# Altium PCB mini_backplane.PcbDoc (part 2 of 5)
Units mm, origin at the board's own origin, x right, y up, seen from the top; angles counter-clockwise.
Board outline 232.03 x 195 mm, 5 copper layers (Top Layer, MidLayer1, GND, POWER, Bottom Layer); 241 components, 200 nets, 1637 pads, 676 vias.
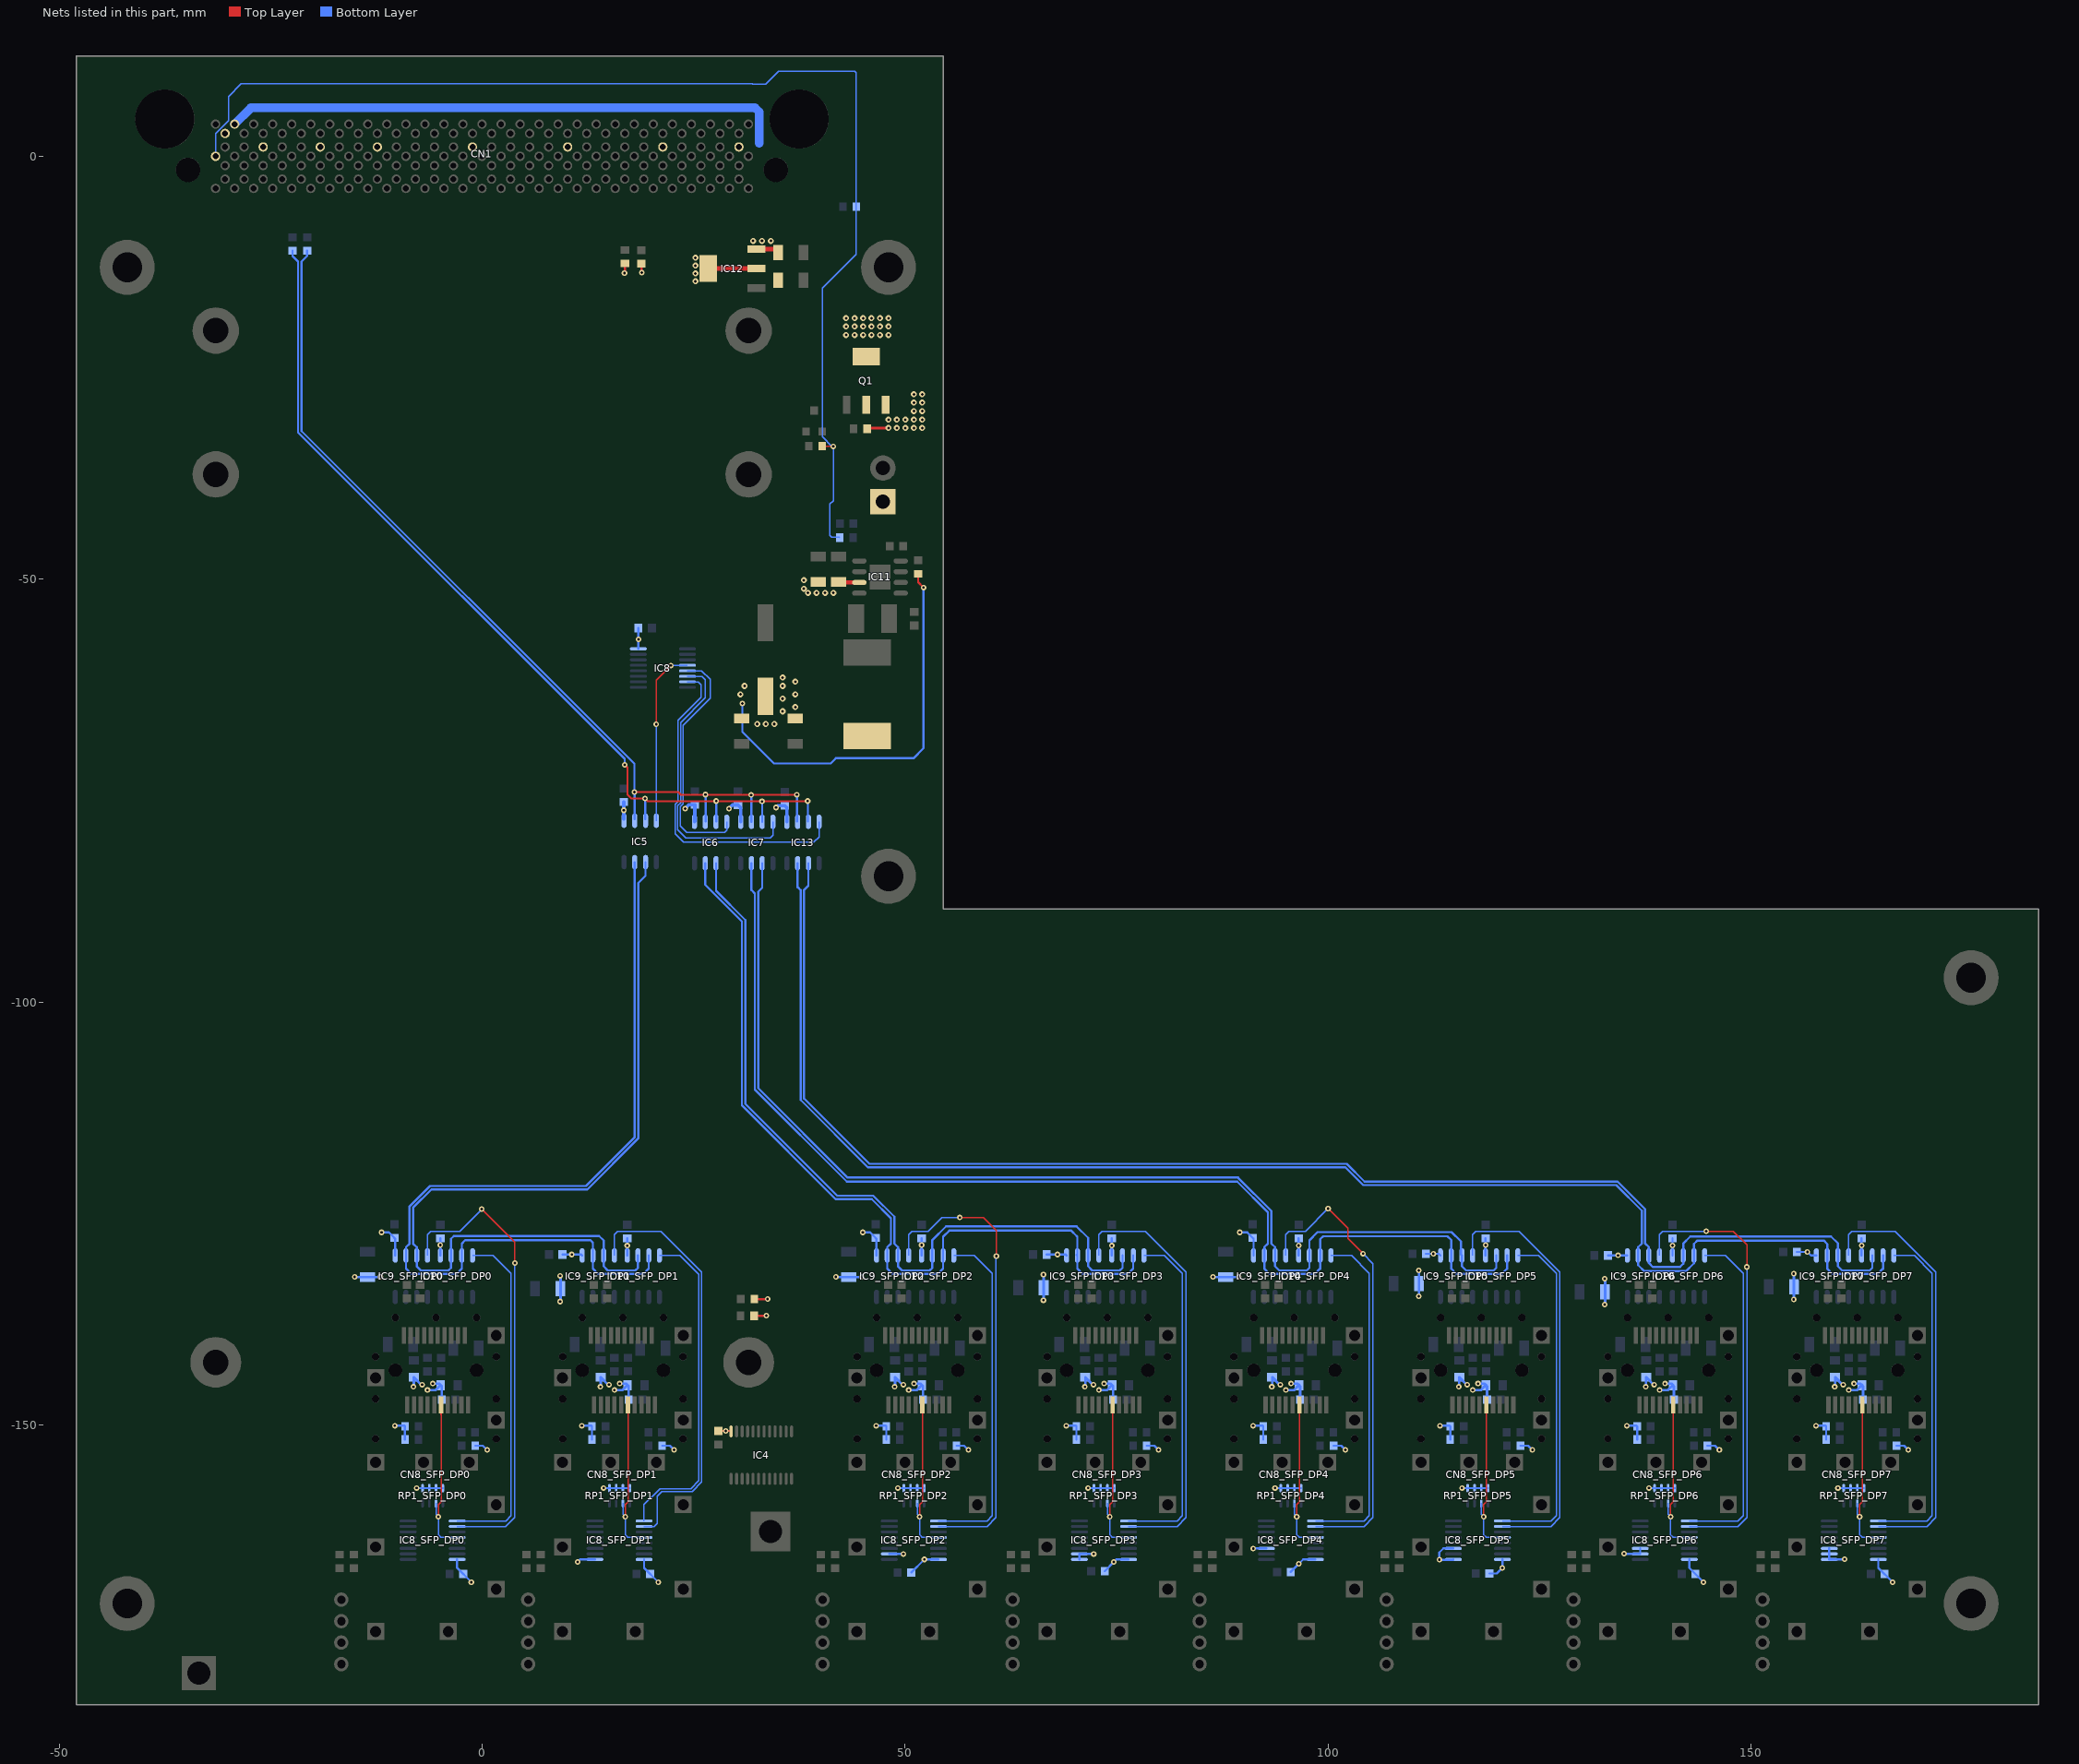
[diagram p4: the nets of this part, all layers, seen from the top]

## Via types
v1: diameter 0.66, hole 0.305, Top Layer to Bottom Layer, tented both sides, 576 vias
v2: diameter 0.711, hole 0.33, Top Layer to Bottom Layer, tented both sides, 97 vias
v3: diameter 0.66, hole 0.305, Top Layer to Bottom Layer, 3 vias

## Nets (pads, with @x,y where several pads share a name; then routed paths per layer and width w, separated by ;. In a path a pad name is that pad's centre, name@x,y a point inside that pad or via, vN(x,y) a via of type N, cw(c..) or ccw(c..) an arc to the next point about the centre after c; other vN are vias at no path point)
+3V3: C75.2 C76.2 C77.2 C78.2 C80_SFP_DP0.2 C80_SFP_DP1.2 C80_SFP_DP2.2 C80_SFP_DP3.2 C80_SFP_DP4.2 C80_SFP_DP5.2 C80_SFP_DP6.2 C80_SFP_DP7.2 C81_SFP_DP0.2 C81_SFP_DP1.2 C81_SFP_DP2.2 C81_SFP_DP3.2 C81_SFP_DP4.2 C81_SFP_DP5.2 C81_SFP_DP6.2 C81_SFP_DP7.2 C85.1 C90.2 C92.2 C93.2 C121.2 C121_SFP_DP0.2 C121_SFP_DP1.2 C121_SFP_DP2.2 C121_SFP_DP3.2 C121_SFP_DP4.2 C121_SFP_DP5.2 C121_SFP_DP6.2 C121_SFP_DP7.2 C122_SFP_DP0.2 C122_SFP_DP1.2 C122_SFP_DP2.2 C122_SFP_DP3.2 C122_SFP_DP4.2 C122_SFP_DP5.2 C122_SFP_DP6.2 C122_SFP_DP7.2 C123_SFP_DP0.2 C123_SFP_DP1.2 C123_SFP_DP2.2 C123_SFP_DP3.2 C123_SFP_DP4.2 C123_SFP_DP5.2 C123_SFP_DP6.2 C123_SFP_DP7.2 IC4.24 IC5.5 IC6.5 IC7.5 IC8.16 IC8_SFP_DP0.16 IC8_SFP_DP1.1 IC8_SFP_DP1.16 IC8_SFP_DP2.2 IC8_SFP_DP2.16 IC8_SFP_DP3.1 IC8_SFP_DP3.2 IC8_SFP_DP3.16 IC8_SFP_DP4.3 IC8_SFP_DP4.16 IC8_SFP_DP5.1 IC8_SFP_DP5.3 IC8_SFP_DP5.16 IC8_SFP_DP6.2 IC8_SFP_DP6.3 IC8_SFP_DP6.16 IC8_SFP_DP7.1 IC8_SFP_DP7.2 IC8_SFP_DP7.3 IC8_SFP_DP7.16 IC9_SFP_DP0.5 IC9_SFP_DP1.5 IC9_SFP_DP2.5 IC9_SFP_DP3.5 IC9_SFP_DP4.5 IC9_SFP_DP5.5 IC9_SFP_DP6.5 IC9_SFP_DP7.5 IC10_SFP_DP0.5 IC10_SFP_DP1.5 IC10_SFP_DP2.5 IC10_SFP_DP3.5 IC10_SFP_DP4.5 IC10_SFP_DP5.5 IC10_SFP_DP6.5 IC10_SFP_DP7.5 IC13.5 L1.2 L8_SFP_DP0.2 L8_SFP_DP1.2 L8_SFP_DP2.2 L8_SFP_DP3.2 L8_SFP_DP4.2 L8_SFP_DP5.2 L8_SFP_DP6.2 L8_SFP_DP7.2 L9_SFP_DP0.2 L9_SFP_DP1.2 L9_SFP_DP2.2 L9_SFP_DP3.2 L9_SFP_DP4.2 L9_SFP_DP5.2 L9_SFP_DP6.2 L9_SFP_DP7.2 R1.2 R2.2 R3.2 R4.2 R21_SFP_DP0.2 R21_SFP_DP1.2 R21_SFP_DP2.2 R21_SFP_DP3.2 R21_SFP_DP4.2 R21_SFP_DP5.2 R21_SFP_DP6.2 R21_SFP_DP7.2 R22_SFP_DP0.2 R22_SFP_DP1.2 R22_SFP_DP2.2 R22_SFP_DP3.2 R22_SFP_DP4.2 R22_SFP_DP5.2 R22_SFP_DP6.2 R22_SFP_DP7.2 R71_SFP_DP0.1 R71_SFP_DP1.1 R71_SFP_DP2.1 R71_SFP_DP3.1 R71_SFP_DP4.1 R71_SFP_DP5.1 R71_SFP_DP6.1 R71_SFP_DP7.1 R76.2 RP1_SFP_DP0.1 RP1_SFP_DP0.2 RP1_SFP_DP0.3 RP1_SFP_DP0.4 RP1_SFP_DP1.1 RP1_SFP_DP1.2 RP1_SFP_DP1.3 RP1_SFP_DP1.4 RP1_SFP_DP2.1 RP1_SFP_DP2.2 RP1_SFP_DP2.3 RP1_SFP_DP2.4 RP1_SFP_DP3.1 RP1_SFP_DP3.2 RP1_SFP_DP3.3 RP1_SFP_DP3.4 RP1_SFP_DP4.1 RP1_SFP_DP4.2 RP1_SFP_DP4.3 RP1_SFP_DP4.4 RP1_SFP_DP5.1 RP1_SFP_DP5.2 RP1_SFP_DP5.3 RP1_SFP_DP5.4 RP1_SFP_DP6.1 RP1_SFP_DP6.2 RP1_SFP_DP6.3 RP1_SFP_DP6.4 RP1_SFP_DP7.1 RP1_SFP_DP7.2 RP1_SFP_DP7.3 RP1_SFP_DP7.4 | length 294.8
  Top Layer w0.254: v1(16.84,-13.807) 16.891,-13.757 R2.2@16.891,-12.677 ; R1.2@18.846,-12.702 18.846,-13.731 v1(18.872,-13.757) ; C75.2@27.94,-150.726 v1(28.803,-150.726) 29.387,-150.726 IC4.24@29.445,-150.784 ; R3.2@32.169,-137.124 33.604,-137.124 v1(33.629,-137.099) ; R4.2@32.194,-135.143 33.731,-135.143 v1(33.756,-135.118) ; R76.2@51.562,-49.38 51.562,-50.358 v1(52.197,-50.993)
  Bottom Layer w0.254: v1(-11.888,-127.244) -11.011,-127.244 C80_SFP_DP0.2@-10.364,-127.891 -10.262,-127.993 IC9_SFP_DP0.5@-10.262,-129.975 ; v1(-10.313,-150.104) -9.182,-150.104 R21_SFP_DP0.2@-9.106,-150.18 R22_SFP_DP0.2@-9.106,-151.729 ; v1(-7.722,-157.47) -7.697,-157.495 RP1_SFP_DP0.4@-4.636,-157.495 ; IC10_SFP_DP0.5@-4.928,-129.975 v1(-4.928,-128.742) C81_SFP_DP0.2@-4.928,-127.942 ; IC8_SFP_DP0.16@-2.942,-165.917 -2.942,-166.91 -1.27,-168.582 v1(-1.27,-168.62) ; R71_SFP_DP0.1@-0.801,-152.466 0.101,-152.466 v1(0.609,-152.974) ; C80_SFP_DP1.2@9.512,-129.86 v1(10.617,-129.86) 11.721,-129.86 IC9_SFP_DP1.5@11.836,-129.975 ; v3(11.303,-166.207) 11.593,-165.917 IC8_SFP_DP1.1@13.356,-165.917 ; v1(11.785,-150.104) 12.916,-150.104 R21_SFP_DP1.2@12.992,-150.18 R22_SFP_DP1.2@12.992,-151.729 ; v1(14.376,-157.47) 14.401,-157.495 RP1_SFP_DP1.4@17.462,-157.495 ; IC10_SFP_DP1.5@17.17,-129.975 v1(17.17,-128.819) C81_SFP_DP1.2@17.17,-127.942 ; IC8_SFP_DP1.16@19.156,-165.917 19.156,-166.91 20.828,-168.582 v1(20.828,-168.62) ; R71_SFP_DP1.1@21.297,-152.466 22.199,-152.466 v1(22.707,-152.974) ; v1(30.784,-64.709) 30.784,-68.062 34.518,-71.796 41.224,-71.796 41.833,-71.186 51.003,-71.186 52.197,-69.992 v1(52.197,-50.993) ; v1(45.008,-127.244) 45.885,-127.244 C80_SFP_DP2.2@46.532,-127.891 46.634,-127.993 IC9_SFP_DP2.5@46.634,-129.975 ; v1(46.583,-150.104) 47.714,-150.104 R21_SFP_DP2.2@47.79,-150.18 R22_SFP_DP2.2@47.79,-151.729 ; IC8_SFP_DP2.2@48.154,-165.267 v1(49.809,-165.268) ; v1(49.174,-157.47) 49.199,-157.495 RP1_SFP_DP2.4@52.26,-157.495 ; C121_SFP_DP2.2@50.736,-167.477 v1(52.296,-165.917) IC8_SFP_DP2.16@53.954,-165.917 ; IC10_SFP_DP2.5@51.968,-129.975 v1(51.968,-128.742) C81_SFP_DP2.2@51.968,-127.942 ; R71_SFP_DP2.1@56.095,-152.466 56.997,-152.466 v1(57.505,-152.974) ; C80_SFP_DP3.2@66.738,-129.86 v1(68.021,-129.86) 68.998,-129.86 IC9_SFP_DP3.5@69.113,-129.975 ; v1(69.062,-150.104) 70.193,-150.104 R21_SFP_DP3.2@70.269,-150.18 R22_SFP_DP3.2@70.269,-151.729 ; IC8_SFP_DP3.1@70.633,-165.917 IC8_SFP_DP3.2@70.633,-165.267 v1(72.313,-165.268) ; v1(71.653,-157.47) 71.678,-157.495 RP1_SFP_DP3.4@74.739,-157.495 ; C121_SFP_DP3.2@73.621,-167.3 v1(74.695,-166.226) 75.004,-165.917 IC8_SFP_DP3.16@76.433,-165.917 ; IC10_SFP_DP3.5@74.447,-129.975 v1(74.447,-128.819) C81_SFP_DP3.2@74.447,-127.942 ; R71_SFP_DP3.1@78.574,-152.466 79.476,-152.466 v1(79.984,-152.974) ; v1(89.585,-127.244) 90.462,-127.244 C80_SFP_DP4.2@91.109,-127.891 91.211,-127.993 IC9_SFP_DP4.5@91.211,-129.975 ; v1(91.16,-150.104) 92.291,-150.104 R21_SFP_DP4.2@92.367,-150.18 R22_SFP_DP4.2@92.367,-151.729 ; v1(91.186,-164.633) 91.201,-164.617 IC8_SFP_DP4.3@92.731,-164.617 ; v1(93.751,-157.47) 93.776,-157.495 RP1_SFP_DP4.4@96.837,-157.495 ; C121_SFP_DP4.2@95.592,-167.401 v1(96.551,-166.442) 97.077,-165.917 IC8_SFP_DP4.16@98.531,-165.917 ; IC10_SFP_DP4.5@96.545,-129.975 v1(96.545,-128.793) C81_SFP_DP4.2@96.545,-127.942 ; R71_SFP_DP4.1@100.672,-152.466 101.574,-152.466 v1(102.082,-152.974) ; C80_SFP_DP5.2@111.594,-129.784 v1(112.471,-129.784) 113.117,-129.784 IC9_SFP_DP5.5@113.309,-129.975 ; v1(113.258,-150.104) 114.389,-150.104 R21_SFP_DP5.2@114.465,-150.18 R22_SFP_DP5.2@114.465,-151.729 ; IC8_SFP_DP5.1@114.829,-165.917 114.792,-165.953 v1(113.182,-165.953) 113.182,-165.09 113.655,-164.617 IC8_SFP_DP5.3@114.829,-164.617 ; v1(115.849,-157.47) 115.874,-157.495 RP1_SFP_DP5.4@118.935,-157.495 ; IC10_SFP_DP5.5@118.643,-129.975 v1(118.643,-128.742) C81_SFP_DP5.2@118.643,-127.942 ; C121_SFP_DP5.2@119.087,-167.579 119.96,-167.579 v1(120.629,-166.91) IC8_SFP_DP5.16@120.629,-165.917 ; R71_SFP_DP5.1@122.77,-152.466 123.672,-152.466 v1(124.18,-152.974) ; C80_SFP_DP6.2@133.108,-129.962 v1(134.315,-129.962) 135.393,-129.962 IC9_SFP_DP6.5@135.407,-129.975 ; v1(135.026,-165.242) 135.051,-165.267 IC8_SFP_DP6.2@136.927,-165.267 IC8_SFP_DP6.3@136.927,-164.617 ; v1(135.356,-150.104) 136.487,-150.104 R21_SFP_DP6.2@136.563,-150.18 R22_SFP_DP6.2@136.563,-151.729 ; v1(137.947,-157.47) 137.972,-157.495 RP1_SFP_DP6.4@141.033,-157.495 ; IC10_SFP_DP6.5@140.741,-129.975 v1@140.741,-128.666 ; v1(140.741,-128.793) v1@140.741,-128.666 ; C81_SFP_DP6.2@140.741,-127.942 v1@140.741,-128.666 ; IC8_SFP_DP6.16@142.727,-165.917 142.727,-166.91 144.399,-168.582 v1(144.399,-168.62) ; R71_SFP_DP6.1@144.868,-152.466 145.77,-152.466 v1(146.278,-152.974) ; C80_SFP_DP7.2@155.435,-129.555 v1(156.692,-129.555) 157.112,-129.975 IC9_SFP_DP7.5@157.759,-129.975 ; v1(157.708,-150.104) 158.839,-150.104 R21_SFP_DP7.2@158.915,-150.18 R22_SFP_DP7.2@158.915,-151.729 ; IC8_SFP_DP7.3@159.279,-164.617 IC8_SFP_DP7.1@159.279,-165.917 161.047,-165.917 v1(161.086,-165.877) ; v1(160.299,-157.47) 160.324,-157.495 RP1_SFP_DP7.4@163.385,-157.495 ; IC10_SFP_DP7.5@163.093,-129.975 C81_SFP_DP7.2@163.093,-127.942 ; IC8_SFP_DP7.16@165.079,-165.917 165.079,-166.91 166.751,-168.582 v1(166.751,-168.62) ; R71_SFP_DP7.1@167.22,-152.466 168.122,-152.466 v1(168.63,-152.974)
  Bottom Layer w0.305: v1(-15.063,-132.502) -15.036,-132.528 C122_SFP_DP0.2@-13.564,-132.528 -12.041,-132.528 v1(-12.015,-132.502) ; v1(-8.103,-145.506) -8.052,-145.456 L8_SFP_DP0.2@-8.052,-144.373 -7.173,-145.252 v1(-7.087,-145.252) ; v1(-6.452,-145.887) -5.471,-145.887 L9_SFP_DP0.2@-4.887,-145.303 ; v1(-5.817,-145.125) -5.064,-145.125 L9_SFP_DP0.2@-4.887,-145.303 ; C123_SFP_DP0.2@-4.763,-147.03 -4.763,-145.427 L9_SFP_DP0.2@-4.887,-145.303 ; v1(9.245,-135.423) 9.272,-135.396 C122_SFP_DP1.2@9.272,-133.924 9.272,-132.401 v1(9.245,-132.375) ; v1(13.995,-145.506) 14.046,-145.456 L8_SFP_DP1.2@14.046,-144.373 14.925,-145.252 v1(15.011,-145.252) ; v1(15.646,-145.887) 16.627,-145.887 L9_SFP_DP1.2@17.211,-145.303 ; v1(16.281,-145.125) 17.034,-145.125 L9_SFP_DP1.2@17.211,-145.303 ; C123_SFP_DP1.2@17.335,-147.03 17.335,-145.427 L9_SFP_DP1.2@17.211,-145.303 ; C121.2@18.478,-55.794 18.478,-57.102 v1(18.491,-57.114) 18.486,-57.119 IC8.16@18.486,-58.243 ; v1(41.833,-132.502) 41.86,-132.528 C122_SFP_DP2.2@43.332,-132.528 44.855,-132.528 v1(44.881,-132.502) ; v1(48.793,-145.506) 48.844,-145.456 L8_SFP_DP2.2@48.844,-144.373 49.723,-145.252 v1(49.809,-145.252) ; v1(50.444,-145.887) 51.425,-145.887 L9_SFP_DP2.2@52.009,-145.303 ; v1(51.079,-145.125) 51.832,-145.125 L9_SFP_DP2.2@52.009,-145.303 ; C123_SFP_DP2.2@52.133,-147.03 52.133,-145.427 L9_SFP_DP2.2@52.009,-145.303 ; v1(66.37,-135.27) 66.397,-135.243 C122_SFP_DP3.2@66.397,-133.772 66.397,-132.249 v1(66.37,-132.222) ; v1(71.272,-145.506) 71.323,-145.456 L8_SFP_DP3.2@71.323,-144.373 72.202,-145.252 v1(72.288,-145.252) ; v1(72.923,-145.887) 73.904,-145.887 L9_SFP_DP3.2@74.488,-145.303 ; v1(73.558,-145.125) 74.311,-145.125 L9_SFP_DP3.2@74.488,-145.303 ; C123_SFP_DP3.2@74.612,-147.03 74.612,-145.427 L9_SFP_DP3.2@74.488,-145.303 ; v1(86.41,-132.502) 86.437,-132.528 C122_SFP_DP4.2@87.909,-132.528 89.432,-132.528 v1(89.458,-132.502) ; v1(93.37,-145.506) 93.421,-145.456 L8_SFP_DP4.2@93.421,-144.373 94.3,-145.252 v1(94.386,-145.252) ; v1(95.021,-145.887) 96.002,-145.887 L9_SFP_DP4.2@96.586,-145.303 ; v1(95.656,-145.125) 96.409,-145.125 L9_SFP_DP4.2@96.586,-145.303 ; C123_SFP_DP4.2@96.71,-147.03 96.71,-145.427 L9_SFP_DP4.2@96.586,-145.303 ; v1(110.744,-134.788) 110.77,-134.761 C122_SFP_DP5.2@110.77,-133.289 110.77,-131.766 v1(110.744,-131.74) ; v1(115.468,-145.506) 115.519,-145.456 L8_SFP_DP5.2@115.519,-144.373 116.398,-145.252 v1(116.484,-145.252) ; v1(117.119,-145.887) 118.1,-145.887 L9_SFP_DP5.2@118.684,-145.303 ; v1(117.754,-145.125) 118.507,-145.125 L9_SFP_DP5.2@118.684,-145.303 ; C123_SFP_DP5.2@118.808,-147.03 118.808,-145.427 L9_SFP_DP5.2@118.684,-145.303 ; v1(132.74,-135.778) 132.767,-135.751 C122_SFP_DP6.2@132.767,-134.28 132.767,-132.757 v1(132.74,-132.73) ; v1(137.566,-145.506) 137.617,-145.456 L8_SFP_DP6.2@137.617,-144.373 138.496,-145.252 v1(138.582,-145.252) ; v1(139.217,-145.887) 140.198,-145.887 L9_SFP_DP6.2@140.782,-145.303 ; v1(139.852,-145.125) 140.605,-145.125 L9_SFP_DP6.2@140.782,-145.303 ; C123_SFP_DP6.2@140.906,-147.03 140.906,-145.427 L9_SFP_DP6.2@140.782,-145.303 ; v1(155.067,-135.169) 155.093,-135.142 C122_SFP_DP7.2@155.093,-133.67 155.093,-132.147 v1(155.067,-132.121) ; v1(159.918,-145.506) 159.969,-145.456 L8_SFP_DP7.2@159.969,-144.373 160.848,-145.252 v1(160.934,-145.252) ; v1(161.569,-145.887) 162.55,-145.887 L9_SFP_DP7.2@163.134,-145.303 ; v1(162.204,-145.125) 162.957,-145.125 L9_SFP_DP7.2@163.134,-145.303 ; C123_SFP_DP7.2@163.258,-147.03 163.258,-145.427 L9_SFP_DP7.2@163.134,-145.303
  Bottom Layer w0.406: IC5.5@16.764,-78.363 v1(16.764,-77.333) C77.2@16.764,-76.355 ; v1(24.003,-77.13) 24.447,-76.685 C90.2@25.171,-76.685 25.171,-78.642 IC6.5@25.12,-78.693 ; v1(29.184,-77.13) 29.603,-76.71 C76.2@30.251,-76.71 30.581,-77.041 IC7.5@30.581,-78.693 ; v1(34.747,-77.003) 34.963,-76.787 C78.2@35.788,-76.787 36.042,-77.041 IC13.5@36.042,-78.693
  other v1: 163.093,-128.793
  other v2: 32.548,-67.133 33.548,-67.133 34.548,-67.133 35.548,-65.633 37.048,-65.133 35.548,-64.133 30.548,-63.633 37.048,-63.633 31.048,-62.633 35.548,-62.633 37.048,-62.133 35.548,-61.633
+3V3_MP: C89.2 CN1.4 IC12.2 IC12.4 | length 72.4
  Top Layer w0.508: IC12.4@26.741,-13.274 IC12.2@32.441,-13.274
  Bottom Layer w1.016: CN1.4@-29.25,3.8 -27.325,5.725 32.283,5.725 32.766,5.243 32.766,1.534
  other v2: 25.222,-14.773 25.222,-13.85 25.222,-12.927 25.222,-12.004
+12V_MCH: CN1.2 CN1.9 CN1.18 CN1.27 CN1.42 CN1.57 CN1.72 CN1.84 Q1.2 Q1.4
  other v2: 43.048,-21.133 44.048,-21.133 45.048,-21.133 46.048,-21.133 47.048,-21.133 48.048,-21.133 43.048,-20.133 44.048,-20.133 45.048,-20.133 46.048,-20.133 47.048,-20.133 48.048,-20.133 43.048,-19.133 44.048,-19.133 45.048,-19.133 46.048,-19.133 47.048,-19.133 48.048,-19.133
+12V_PSU: C86.2 C87.2 C88.2 CN2.1 IC11.7 IC12.3 Q1.3 R6.2 | length 7.2
  Top Layer w0.305: R6.2@45.529,-32.222 45.618,-32.133 v2(48.048,-32.133)
  Top Layer w0.508: IC12.3@32.441,-10.974 C86.2@34.604,-10.974 ; C88.2@42.164,-50.334 42.223,-50.393 IC11.7@44.602,-50.393
  other v2: 38.548,-51.633 39.548,-51.633 40.548,-51.633 41.548,-51.633 38.048,-51.133 38.048,-50.133 49.048,-32.133 50.048,-32.133 51.048,-32.133 52.048,-32.133 48.048,-31.133 49.048,-31.133 50.048,-31.133 51.048,-31.133 52.048,-31.133 51.048,-30.133 52.048,-30.133 51.048,-29.133 52.048,-29.133 51.048,-28.133 52.048,-28.133 32.054,-9.997 33.096,-9.997 34.137,-9.997
BUF_EN0: IC5.8 IC8.4 | length 21
  Top Layer w0.152: v1(20.599,-67.173) 20.599,-61.94 v1(22.326,-60.213)
  Bottom Layer w0.152: IC5.8@20.599,-78.566 v1(20.599,-67.173) ; v1(22.326,-60.213) 22.346,-60.193 IC8.4@24.286,-60.193
BUF_EN1: IC6.8 IC8.5 | length 28.8
  Bottom Layer w0.152: IC8.5@24.286,-60.843 25.953,-60.843 26.974,-61.864 26.974,-64.099 23.774,-67.3 23.774,-76.568 23.444,-76.898 23.444,-79.162 24.231,-79.949 28.651,-79.949 28.93,-79.67 28.93,-78.72 IC6.8@28.93,-78.693
BUF_EN2: IC7.8 IC8.6 | length 34.7
  Bottom Layer w0.152: IC8.6@24.286,-61.493 25.994,-61.493 26.39,-61.89 26.39,-64.049 23.469,-66.97 23.469,-76.442 23.139,-76.772 23.139,-79.644 24.079,-80.584 34.061,-80.584 34.391,-80.254 IC7.8@34.391,-78.693
BUF_EN3: IC8.7 IC13.8 | length 40.1
  Bottom Layer w0.152: IC8.7@24.286,-62.143 25.551,-62.143 25.882,-62.474 25.882,-63.972 23.164,-66.69 23.164,-76.315 22.834,-76.646 22.834,-80.101 23.85,-81.117 39.217,-81.117 39.852,-80.482 IC13.8@39.852,-78.693
BULK_EN: CN1.170 R5.1 R11.2 R12.1 | length 143
  Top Layer w0.152: R11.2@40.22,-34.28 41.503,-34.28 v1(41.529,-34.305)
  Bottom Layer w0.152: CN1.170@-31.5,0 -31.5,2.676 -29.979,4.198 -29.979,7.065 -28.474,8.57 31.927,8.57 31.978,8.519 33.528,8.519 35.077,10.069 44.069,10.069 44.246,9.891 44.246,-11.598 40.233,-15.611 40.233,-33.162 41.402,-34.331 v1@41.503,-34.331 ; v1(41.529,-34.305) 41.529,-40.706 41.122,-41.112 41.122,-44.821 41.325,-45.024 42.202,-45.024 R5.1@42.278,-45.1
DETECT_SFP_DP0: CN8_SFP_DP0.6 IC8_SFP_DP0.12 RP1_SFP_DP0.6 | length 20.9
  Top Layer w0.152: v1(-5.157,-160.873) -5.157,-159.451 -4.826,-159.121 -4.826,-147.657 CN8_SFP_DP0.6@-4.843,-147.64 -4.843,-148.859
  Bottom Layer w0.152: RP1_SFP_DP0.6@-5.436,-159.273 -5.436,-160.594 v1(-5.157,-160.873) -5.157,-163.007 -4.852,-163.312 -4.268,-163.312 ; -4.171,-163.312 -4.268,-163.312 ; IC8_SFP_DP0.12@-2.942,-163.317 -2.948,-163.312 -4.268,-163.312
DETECT_SFP_DP1: CN8_SFP_DP1.6 IC8_SFP_DP1.12 RP1_SFP_DP1.6 | length 20.9
  Top Layer w0.152: v1(16.941,-160.873) 16.941,-159.451 17.272,-159.121 17.272,-147.657 CN8_SFP_DP1.6@17.255,-147.64 17.255,-148.859
  Bottom Layer w0.152: RP1_SFP_DP1.6@16.662,-159.273 16.662,-160.594 v1(16.941,-160.873) 16.941,-163.007 17.246,-163.312 17.83,-163.312 ; 17.927,-163.312 17.83,-163.312 ; IC8_SFP_DP1.12@19.156,-163.317 19.15,-163.312 17.83,-163.312
DETECT_SFP_DP2: CN8_SFP_DP2.6 IC8_SFP_DP2.12 RP1_SFP_DP2.6 | length 20.9
  Top Layer w0.152: v1(51.739,-160.873) 51.739,-159.451 52.07,-159.121 52.07,-147.657 CN8_SFP_DP2.6@52.053,-147.64 52.053,-148.859
  Bottom Layer w0.152: RP1_SFP_DP2.6@51.46,-159.273 51.46,-160.594 v1(51.739,-160.873) 51.739,-163.007 52.044,-163.312 52.628,-163.312 ; 52.725,-163.312 52.628,-163.312 ; IC8_SFP_DP2.12@53.954,-163.317 53.948,-163.312 52.628,-163.312
DETECT_SFP_DP3: CN8_SFP_DP3.6 IC8_SFP_DP3.12 RP1_SFP_DP3.6 | length 20.9
  Top Layer w0.152: v1(74.218,-160.873) 74.218,-159.451 74.549,-159.121 74.549,-147.657 CN8_SFP_DP3.6@74.532,-147.64 74.532,-148.859
  Bottom Layer w0.152: RP1_SFP_DP3.6@73.939,-159.273 73.939,-160.594 v1(74.218,-160.873) 74.218,-163.007 74.523,-163.312 75.107,-163.312 ; 75.204,-163.312 75.107,-163.312 ; IC8_SFP_DP3.12@76.433,-163.317 76.427,-163.312 75.107,-163.312
DETECT_SFP_DP4: CN8_SFP_DP4.6 IC8_SFP_DP4.12 RP1_SFP_DP4.6 | length 20.9
  Top Layer w0.152: v1(96.316,-160.873) 96.316,-159.451 96.647,-159.121 96.647,-147.657 CN8_SFP_DP4.6@96.63,-147.64 96.63,-148.859
  Bottom Layer w0.152: RP1_SFP_DP4.6@96.037,-159.273 96.037,-160.594 v1(96.316,-160.873) 96.316,-163.007 96.621,-163.312 97.205,-163.312 ; 97.302,-163.312 97.205,-163.312 ; IC8_SFP_DP4.12@98.531,-163.317 98.525,-163.312 97.205,-163.312
DETECT_SFP_DP5: CN8_SFP_DP5.6 IC8_SFP_DP5.12 RP1_SFP_DP5.6 | length 20.9
  Top Layer w0.152: v1(118.414,-160.873) 118.414,-159.451 118.745,-159.121 118.745,-147.657 CN8_SFP_DP5.6@118.728,-147.64 118.728,-148.859
  Bottom Layer w0.152: RP1_SFP_DP5.6@118.135,-159.273 118.135,-160.594 v1(118.414,-160.873) 118.414,-163.007 118.719,-163.312 119.303,-163.312 ; 119.4,-163.312 119.303,-163.312 ; IC8_SFP_DP5.12@120.629,-163.317 120.623,-163.312 119.303,-163.312
DETECT_SFP_DP6: CN8_SFP_DP6.6 IC8_SFP_DP6.12 RP1_SFP_DP6.6 | length 20.9
  Top Layer w0.152: v1(140.512,-160.873) 140.512,-159.451 140.843,-159.121 140.843,-147.657 CN8_SFP_DP6.6@140.826,-147.64 140.826,-148.859
  Bottom Layer w0.152: RP1_SFP_DP6.6@140.233,-159.273 140.233,-160.594 v1(140.512,-160.873) 140.512,-163.007 140.817,-163.312 141.401,-163.312 ; 141.498,-163.312 141.401,-163.312 ; IC8_SFP_DP6.12@142.727,-163.317 142.721,-163.312 141.401,-163.312
DETECT_SFP_DP7: CN8_SFP_DP7.6 IC8_SFP_DP7.12 RP1_SFP_DP7.6 | length 20.9
  Top Layer w0.152: v1(162.864,-160.873) 162.864,-159.451 163.195,-159.121 163.195,-147.657 CN8_SFP_DP7.6@163.178,-147.64 163.178,-148.859
  Bottom Layer w0.152: RP1_SFP_DP7.6@162.585,-159.273 162.585,-160.594 v1(162.864,-160.873) 162.864,-163.007 163.169,-163.312 163.753,-163.312 ; 163.85,-163.312 163.753,-163.312 ; IC8_SFP_DP7.12@165.079,-163.317 165.073,-163.312 163.753,-163.312
EN_FB_RX_SFP_DP0: IC8_SFP_DP0.10 IC9_SFP_DP0.8 | length 56.1
  Top Layer w0.152: v1(-0.026,-124.501) 3.886,-128.412 v1(3.886,-130.876)
  Bottom Layer w0.152: IC9_SFP_DP0.8@-6.452,-129.975 -6.452,-127.498 -6.071,-127.117 -2.642,-127.117 v1(-0.026,-124.501) ; IC8_SFP_DP0.10@-2.942,-162.017 2.793,-162.017 3.86,-160.95 3.86,-132.552 ; 3.86,-131.917 3.86,-132.552 ; v1(3.886,-130.876) 3.86,-130.901 3.86,-132.552
EN_FB_RX_SFP_DP1: IC8_SFP_DP1.10 IC9_SFP_DP1.8 | length 50.6
  Bottom Layer w0.152: IC9_SFP_DP1.8@15.646,-129.975 15.646,-127.498 16.027,-127.117 21.158,-127.117 25.958,-131.917 25.958,-156.759 24.841,-157.876 21.285,-157.876 20.701,-158.46 20.701,-161.661 20.344,-162.017 IC8_SFP_DP1.10@19.156,-162.017
EN_FB_RX_SFP_DP2: IC8_SFP_DP2.10 IC9_SFP_DP2.8 | length 55.5
  Top Layer w0.152: v1(56.489,-125.491) 59.258,-125.491 60.807,-127.041 v1(60.807,-130.063)
  Bottom Layer w0.152: IC9_SFP_DP2.8@50.444,-129.975 50.444,-127.498 50.825,-127.117 52.755,-127.117 54.381,-125.491 v1(56.489,-125.491) ; IC8_SFP_DP2.10@53.954,-162.017 59.689,-162.017 60.756,-160.95 60.756,-130.114 v1(60.807,-130.063)
EN_FB_RX_SFP_DP3: IC8_SFP_DP3.10 IC9_SFP_DP3.8 | length 51.2
  Bottom Layer w0.152: IC9_SFP_DP3.8@72.923,-129.975 72.923,-127.498 73.304,-127.117 78.435,-127.117 83.235,-131.917 83.235,-160.95 82.168,-162.017 IC8_SFP_DP3.10@76.433,-162.017
EN_FB_RX_SFP_DP4: IC8_SFP_DP4.10 IC9_SFP_DP4.8 | length 55
  Top Layer w0.152: v1(100.025,-124.424) 102.362,-126.761 102.362,-127.955 v1(104.165,-129.758)
  Bottom Layer w0.152: IC9_SFP_DP4.8@95.021,-129.975 95.021,-127.498 95.402,-127.117 97.332,-127.117 v1(100.025,-124.424) ; IC8_SFP_DP4.10@98.531,-162.017 104.266,-162.017 105.333,-160.95 105.333,-132.171 ; v1(104.165,-129.758) 105.333,-130.927 105.333,-132.171 ; 105.333,-131.917 105.333,-132.171
EN_FB_RX_SFP_DP5: IC8_SFP_DP5.10 IC9_SFP_DP5.8 | length 51.2
  Bottom Layer w0.152: IC9_SFP_DP5.8@117.119,-129.975 117.119,-127.498 117.5,-127.117 122.631,-127.117 127.431,-131.917 127.431,-160.95 126.364,-162.017 IC8_SFP_DP5.10@120.629,-162.017
EN_FB_RX_SFP_DP6: IC8_SFP_DP6.10 IC9_SFP_DP6.8 | length 53.1
  Top Layer w0.152: v1(144.729,-127.117) 147.929,-127.117 149.529,-128.717 v1(149.529,-131.333)
  Bottom Layer w0.152: IC9_SFP_DP6.8@139.217,-129.975 139.217,-127.498 139.598,-127.117 v1(144.729,-127.117) ; IC8_SFP_DP6.10@142.727,-162.017 148.462,-162.017 149.529,-160.95 v1(149.529,-131.333)
EN_FB_RX_SFP_DP7: IC8_SFP_DP7.10 IC9_SFP_DP7.8 | length 51.2
  Bottom Layer w0.152: IC9_SFP_DP7.8@161.569,-129.975 161.569,-127.498 161.95,-127.117 167.081,-127.117 171.881,-131.917 171.881,-160.95 170.814,-162.017 IC8_SFP_DP7.10@165.079,-162.017
EN_FB_TX_SFP_DP0: IC8_SFP_DP0.9 IC10_SFP_DP0.8 | length 40.7
  Bottom Layer w0.152: IC8_SFP_DP0.9@-2.942,-161.367 2.808,-161.367 3.429,-160.746 3.429,-132.095 1.309,-129.975 IC10_SFP_DP0.8@-1.118,-129.975
EN_FB_TX_SFP_DP1: IC8_SFP_DP1.9 IC10_SFP_DP1.8 | length 39.6
  Bottom Layer w0.152: IC8_SFP_DP1.9@19.156,-161.367 19.156,-159.421 21.031,-157.546 24.691,-157.546 25.628,-156.609 25.628,-132.197 23.407,-129.975 IC10_SFP_DP1.8@20.98,-129.975
EN_FB_TX_SFP_DP2: IC8_SFP_DP2.9 IC10_SFP_DP2.8 | length 40.7
  Bottom Layer w0.152: IC8_SFP_DP2.9@53.954,-161.367 59.704,-161.367 60.325,-160.746 60.325,-132.095 58.205,-129.975 IC10_SFP_DP2.8@55.778,-129.975
EN_FB_TX_SFP_DP3: IC8_SFP_DP3.9 IC10_SFP_DP3.8 | length 40.7
  Bottom Layer w0.152: IC8_SFP_DP3.9@76.433,-161.367 82.183,-161.367 82.804,-160.746 82.804,-132.095 80.684,-129.975 IC10_SFP_DP3.8@78.257,-129.975
EN_FB_TX_SFP_DP4: IC8_SFP_DP4.9 IC10_SFP_DP4.8 | length 40.7
  Bottom Layer w0.152: IC8_SFP_DP4.9@98.531,-161.367 104.281,-161.367 104.902,-160.746 104.902,-132.095 102.782,-129.975 IC10_SFP_DP4.8@100.355,-129.975
EN_FB_TX_SFP_DP5: IC8_SFP_DP5.9 IC10_SFP_DP5.8 | length 40.7
  Bottom Layer w0.152: IC8_SFP_DP5.9@120.629,-161.367 126.379,-161.367 127,-160.746 127,-132.095 124.88,-129.975 IC10_SFP_DP5.8@122.453,-129.975
EN_FB_TX_SFP_DP6: IC8_SFP_DP6.9 IC10_SFP_DP6.8 | length 40.7
  Bottom Layer w0.152: IC8_SFP_DP6.9@142.727,-161.367 148.477,-161.367 149.098,-160.746 149.098,-132.095 146.978,-129.975 IC10_SFP_DP6.8@144.551,-129.975
EN_FB_TX_SFP_DP7: IC8_SFP_DP7.9 IC10_SFP_DP7.8 | length 40.7
  Bottom Layer w0.152: IC8_SFP_DP7.9@165.079,-161.367 170.829,-161.367 171.45,-160.746 171.45,-132.095 169.33,-129.975 IC10_SFP_DP7.8@166.903,-129.975
FB_01_N: IC5.3 IC9_SFP_DP0.6 IC9_SFP_DP1.6 IC10_SFP_DP0.7 IC10_SFP_DP1.7 | length 107.7
  Bottom Layer w0.254: IC5.3@18.059,-83.466 18.059,-115.976 12.277,-121.757 -6.163,-121.757 -8.56,-124.154 -8.56,-128.565 -8.992,-128.996 IC9_SFP_DP0.6@-8.992,-129.975 -8.992,-131.536 -8.382,-132.146 -2.998,-132.146 -2.388,-131.536 IC10_SFP_DP0.7@-2.388,-129.975 -2.388,-128.565 -1.982,-128.158 12.801,-128.158 13.106,-128.463 IC9_SFP_DP1.6@13.106,-129.975 13.106,-131.536 13.716,-132.146 19.1,-132.146 19.71,-131.536 IC10_SFP_DP1.7@19.71,-129.975
FB_01_P: IC5.2 IC9_SFP_DP0.7 IC9_SFP_DP1.7 IC10_SFP_DP0.6 IC10_SFP_DP1.6 | length 105.3
  Bottom Layer w0.254: IC10_SFP_DP1.6@18.44,-129.975 18.44,-131.435 18.135,-131.74 14.859,-131.74 14.376,-131.257 IC9_SFP_DP1.7@14.376,-129.975 14.376,-128.209 13.843,-127.676 -3.328,-127.676 -3.658,-128.006 IC10_SFP_DP0.6@-3.658,-129.975 -3.658,-131.435 -3.963,-131.74 -7.239,-131.74 -7.722,-131.257 IC9_SFP_DP0.7@-7.722,-129.975 -7.722,-128.996 -8.154,-128.565 -8.154,-124.323 -5.995,-122.164 12.446,-122.164 18.465,-116.144 18.465,-85.943 19.329,-85.08 IC5.2@19.329,-83.466
FB_23_N: IC6.3 IC9_SFP_DP2.6 IC9_SFP_DP3.6 IC10_SFP_DP2.7 IC10_SFP_DP3.7 | length 99.6
  Bottom Layer w0.254: IC6.3@26.39,-83.593 26.39,-86.147 30.721,-90.477 30.721,-112.22 41.808,-123.307 46.075,-123.307 48.336,-125.567 48.336,-128.565 47.904,-128.996 IC9_SFP_DP2.6@47.904,-129.975 47.904,-131.536 48.514,-132.146 53.898,-132.146 54.508,-131.536 IC10_SFP_DP2.7@54.508,-129.975 54.508,-127.777 55.245,-127.041 69.672,-127.041 70.307,-127.676 70.383,-127.752 IC9_SFP_DP3.6@70.383,-129.975 ; IC9_SFP_DP3.6@70.307,-129.899 IC9_SFP_DP3.6@70.383,-129.975 ; IC10_SFP_DP3.7@76.987,-129.975 76.987,-131.536 76.377,-132.146 70.993,-132.146 70.383,-131.536 IC9_SFP_DP3.6@70.383,-129.975
FB_23_P: IC6.2 IC9_SFP_DP2.7 IC9_SFP_DP3.7 IC10_SFP_DP2.6 IC10_SFP_DP3.6 | length 96.5
  Bottom Layer w0.254: IC6.2@27.66,-83.593 27.66,-86.842 31.127,-90.309 31.127,-112.051 41.976,-122.9 46.244,-122.9 48.742,-125.399 48.742,-128.565 49.174,-128.996 IC9_SFP_DP2.7@49.174,-129.975 49.174,-131.257 49.657,-131.74 52.933,-131.74 53.238,-131.435 IC10_SFP_DP2.6@53.238,-129.975 53.238,-128.158 54.864,-126.533 62.255,-126.533 ; 63.144,-126.533 62.255,-126.533 ; IC10_SFP_DP3.6@75.717,-129.975 75.717,-131.435 75.412,-131.74 72.136,-131.74 71.653,-131.257 IC9_SFP_DP3.7@71.653,-129.975 71.653,-127.904 70.281,-126.533 62.255,-126.533
FB_45_N: IC7.3 IC9_SFP_DP4.6 IC9_SFP_DP5.6 IC10_SFP_DP4.7 IC10_SFP_DP5.7 | length 138.9
  Bottom Layer w0.254: IC7.3@31.851,-83.593 31.851,-86.756 32.258,-87.163 32.258,-110.369 43.138,-121.249 89.281,-121.249 92.913,-124.882 92.913,-128.565 92.481,-128.996 IC9_SFP_DP4.6@92.481,-129.975 92.481,-131.536 93.091,-132.146 98.475,-132.146 99.085,-131.536 IC10_SFP_DP4.7@99.085,-129.975 99.085,-128.057 99.441,-127.701 114.122,-127.701 114.579,-128.158 114.579,-129.876 IC9_SFP_DP5.6@114.579,-129.975 114.579,-131.536 115.189,-132.146 120.573,-132.146 121.183,-131.536 IC10_SFP_DP5.7@121.183,-129.975
FB_45_P: IC7.2 IC9_SFP_DP4.7 IC9_SFP_DP5.7 IC10_SFP_DP4.6 IC10_SFP_DP5.6 | length 135.4
  Bottom Layer w0.254: IC7.2@33.121,-83.593 33.121,-86.502 32.664,-86.959 32.664,-110.2 43.23,-120.767 89.373,-120.767 93.319,-124.713 93.319,-128.565 93.751,-128.996 IC9_SFP_DP4.7@93.751,-129.975 93.751,-131.257 94.234,-131.74 97.51,-131.74 97.815,-131.435 IC10_SFP_DP4.6@97.815,-129.975 97.815,-128.184 98.78,-127.218 114.63,-127.218 115.747,-128.336 115.747,-129.874 IC9_SFP_DP5.7@115.849,-129.975 115.849,-131.257 116.332,-131.74 119.608,-131.74 119.913,-131.435 IC10_SFP_DP5.6@119.913,-129.975
FB_67_N: IC9_SFP_DP6.6 IC9_SFP_DP7.6 IC10_SFP_DP6.7 IC10_SFP_DP7.7 IC13.3 | length 176.9
  Bottom Layer w0.254: IC13.3@37.312,-83.593 37.312,-84.877 37.312,-85.004 37.312,-86.426 37.668,-86.782 37.668,-111.588 45.627,-119.548 102.066,-119.548 104.174,-121.656 134.086,-121.656 137.109,-124.678 137.109,-128.565 136.677,-128.996 IC9_SFP_DP6.6@136.677,-129.975 136.677,-131.105 137.414,-131.841 142.341,-131.841 143.281,-130.901 IC10_SFP_DP6.7@143.281,-129.975 143.281,-128.615 143.687,-128.209 158.623,-128.209 159.054,-128.641 159.054,-129.95 IC9_SFP_DP7.6@159.029,-129.975 159.029,-131.536 159.639,-132.146 165.023,-132.146 165.633,-131.536 IC10_SFP_DP7.7@165.633,-129.975
FB_67_P: IC9_SFP_DP6.7 IC9_SFP_DP7.7 IC10_SFP_DP6.6 IC10_SFP_DP7.6 IC13.2 | length 173.8
  Bottom Layer w0.254: IC13.2@38.582,-83.593 38.582,-84.8 38.582,-84.927 38.582,-86.248 38.074,-86.756 38.074,-111.42 45.796,-119.141 102.235,-119.141 104.343,-121.249 134.255,-121.249 137.515,-124.51 137.515,-128.565 137.947,-128.996 IC9_SFP_DP6.7@137.947,-129.975 137.947,-130.876 138.404,-131.333 141.63,-131.333 142.011,-130.952 IC10_SFP_DP6.6@142.011,-129.975 142.011,-128.565 142.849,-127.726 145.008,-127.726 159.486,-127.726 160.299,-128.539 IC9_SFP_DP7.7@160.299,-129.975 160.299,-131.257 160.782,-131.74 164.058,-131.74 164.363,-131.435 IC10_SFP_DP7.6@164.363,-129.975
FB_MUXED_N: C48.1 IC5.6 IC6.6 IC7.6 IC13.6 | length 112.6
  Top Layer w0.254: v1@17.957,-75.123 v1(18.008,-75.174) 23.19,-75.174 23.52,-75.504 v1@37.227,-75.504
  Bottom Layer w0.254: C48.1@-20.676,-11.178 -20.676,-11.801 -21.336,-12.461 -21.336,-32.486 18.008,-71.83 v1@18.008,-75.148 ; IC5.6@18.034,-78.363 v1@18.034,-75.199 ; IC6.6@26.441,-78.667 v1@26.441,-75.504 ; IC7.6@31.851,-78.693 v1@31.851,-75.555 ; IC13.6@37.252,-78.671 v1@37.252,-75.508
  other v1: 31.826,-75.529 26.416,-75.479 37.227,-75.483
FB_MUXED_P: C46.1 IC5.7 IC6.7 IC7.7 IC13.7 | length 112.2
  Top Layer w0.254: v1(16.865,-71.948) 17.195,-72.278 17.195,-75.479 17.653,-75.936 18.161,-75.936 ; 17.908,-75.936 18.161,-75.936 ; v1@38.497,-76.266 19.608,-76.266 v1(19.278,-75.936) 18.161,-75.936
  Bottom Layer w0.254: C46.1@-22.403,-11.178 -22.403,-11.801 -21.743,-12.461 -21.743,-32.654 16.865,-71.262 v1(16.865,-71.948) ; IC5.7@19.304,-78.363 v1@19.304,-75.961 ; IC6.7@27.711,-78.667 v1@27.711,-76.266 ; IC7.7@33.121,-78.693 v1@33.121,-76.317 ; IC13.7@38.522,-78.671 v1@38.522,-76.27
  other v1: 33.096,-76.291 27.686,-76.241 38.497,-76.245